# EAGLE board Arduino-Mega-2560-Adapter_2 (EAGLE 6.6.0)
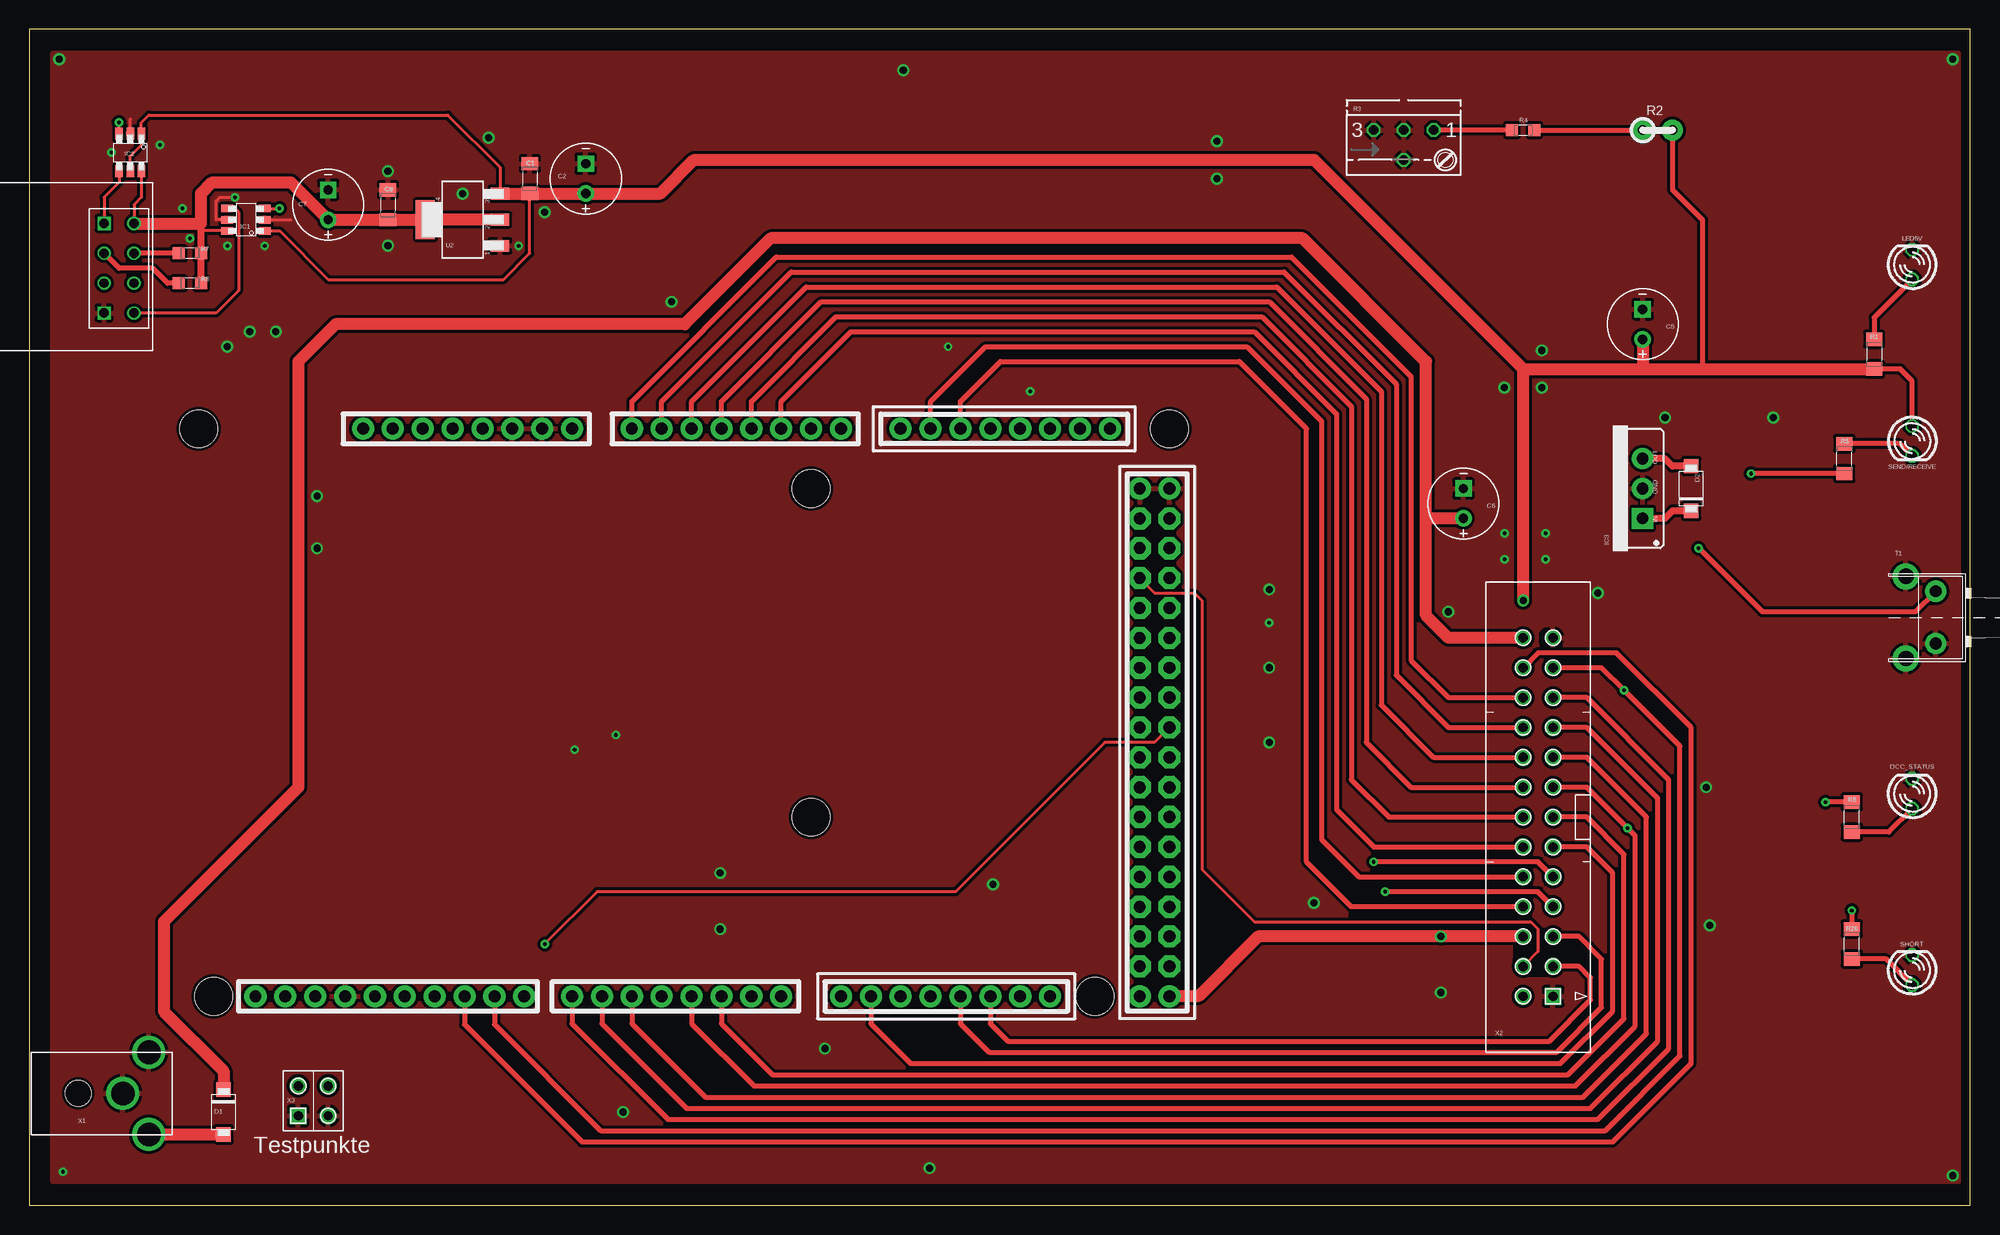
[diagram p0: board, top side]
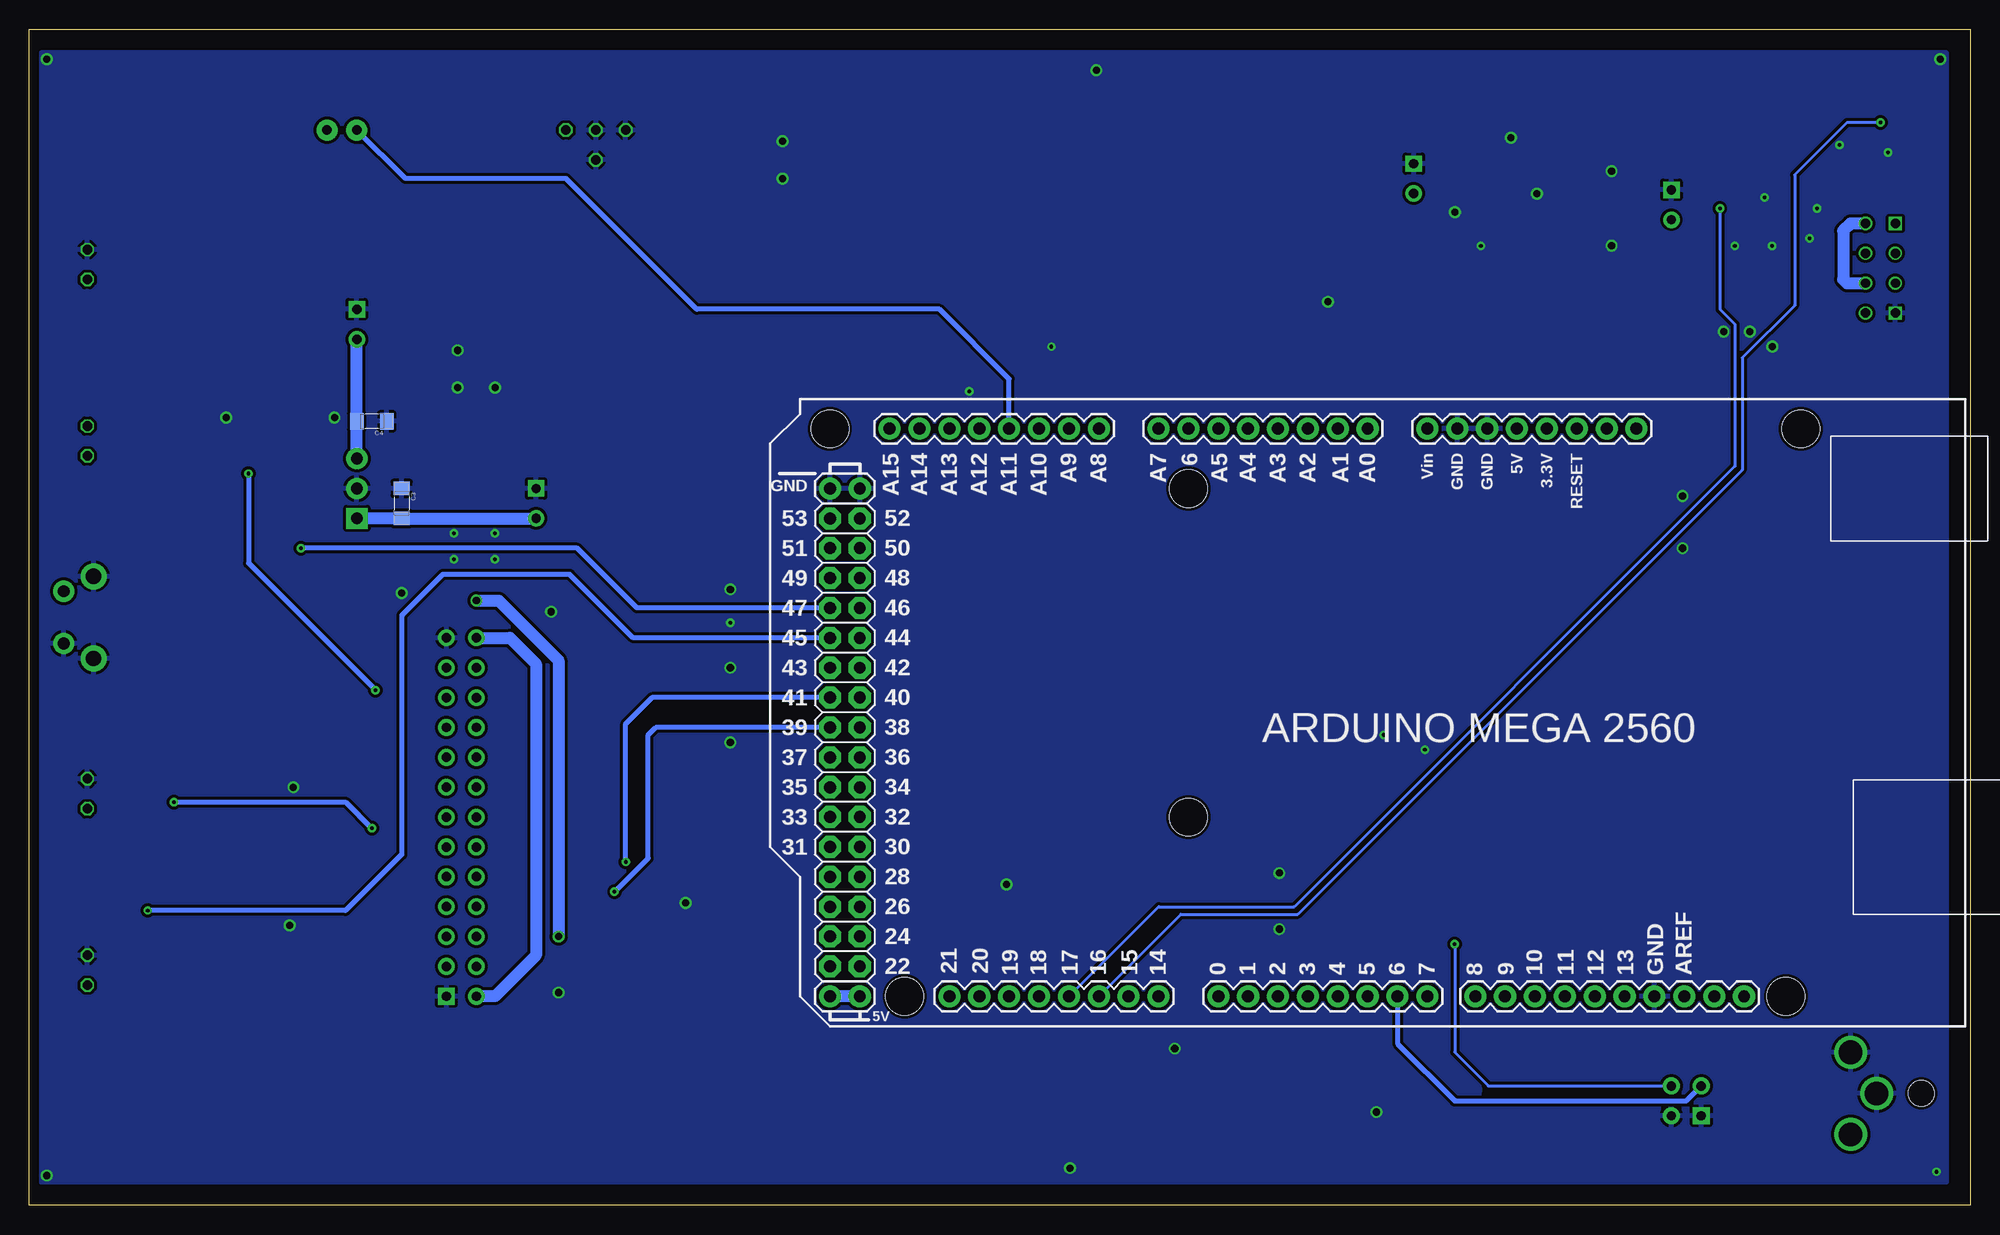
[diagram p1: board, bottom side, seen from below]

Size 165 x 100 mm. Coordinates in mm from the lower left corner, seen from the top.
Outline: 0,0 165,0 165,100 0,100 0,0
Copper layers (1*16): Top 0.035mm / dielectric 1.5mm / Bottom 0.035mm
Design rules "mme-pcb_Doppelseitig *": minimum track width 6mil, minimum drill 0.3mm, track to track 6mil, track to pad 6mil, pad to pad 6mil, via to via 6mil, smd to smd 0mil, copper to edge 8mil, drill to drill 8mil, minimum pad ring 6mil, minimum via ring 8mil, stop-mask expansion 4mil, vias tented up to drill 30mil, thermal gap 10mil
tRestrict: 6 lines
bRestrict: 1 lines

## Footprints (pad centres in the part's own frame; a part is rotated, then mirrored left to right if it is on the bottom)
C0805 = smd 1.143 x 1.372: 1 -1.27,0; 2 1.27,0
RM2.5_DIA6 = drill 0.8 pad 1.4 square: MINUS 0,0 | drill 0.8 pad 1.4: PLUS 0,2.54
SUB-SMA_ = smd 1.219 x 1.219: A -1.905,0; K 1.905,0
LED3MM_ = drill 0.813 octagon: A -1.27,0; K 1.27,0
SOT23-6_ = smd 0.635 x 1.016: 1 -0.953,-1.587; 2 0,-1.587; 3 0.953,-1.587; 4 0.953,1.587; 5 0,1.587; 6 -0.953,1.587
78XXS = drill 1 pad 1.8: GND 0,0; OUT 2.54,0 | drill 1 pad 1.8 square: IN -2.54,0
ARDUINO_MEGA2560 = drill 1.016 pad 1.88: 0 63.5,50.8; 1 60.96,50.8; 2 58.42,50.8; 3 55.88,50.8; 3.3V 35.56,2.54; 4 53.34,50.8; 5 50.8,50.8; 5V 38.1,2.54; 5V. 93.98,50.8; 5V.. 96.52,50.8; 6 48.26,50.8; 7 45.72,50.8; 8 41.656,50.8; 9 39.116,50.8; 10 36.576,50.8; 11 34.036,50.8; 12 31.496,50.8; 13 28.956,50.8; 14 68.58,50.8; 15 71.12,50.8; 16 73.66,50.8; 17 76.2,50.8; 18 78.74,50.8; 19 81.28,50.8; 20 83.82,50.8; 21 86.36,50.8; A0 50.8,2.54; A1 53.34,2.54; A2 55.88,2.54; A3 58.42,2.54; A4 60.96,2.54; A5 63.5,2.54; A6 66.04,2.54; A7 68.58,2.54; A8 73.66,2.54; A9 76.2,2.54; A10 78.74,2.54; A11 81.28,2.54; A12 83.82,2.54; A13 86.36,2.54; A14 88.9,2.54; A15 91.44,2.54; AREF 23.876,50.8; GND 26.416,50.8; GND. 43.18,2.54; GND.. 40.64,2.54; GND... 93.98,7.62; GND.... 96.52,7.62; I/OREF 30.48,2.54; N/C 27.94,2.54; RESET 33.02,2.54; SCL1 18.796,50.8; SDA1 21.336,50.8; VIN 45.72,2.54 | drill 1.016 pad 1.88 octagon: 22 93.98,48.26; 23 96.52,48.26; 24 93.98,45.72; 25 96.52,45.72; 26 93.98,43.18; 27 96.52,43.18; 28 93.98,40.64; 29 96.52,40.64; 30 93.98,38.1; 31 96.52,38.1; 32 93.98,35.56; 33 96.52,35.56; 34 93.98,33.02; 35 96.52,33.02; 36 93.98,30.48; 37 96.52,30.48; 38 93.98,27.94; 39 96.52,27.94; 40 93.98,25.4; 41 96.52,25.4; 42 93.98,22.86; 43 96.52,22.86; 44 93.98,20.32; 45 96.52,20.32; 46 93.98,17.78; 47 96.52,17.78; 48 93.98,15.24; 49 96.52,15.24; 50 93.98,12.7; 51 96.52,12.7; 52 93.98,10.16; 53 96.52,10.16 | hole 3.2: 15.24,50.8; 13.97,2.54; 66.04,35.56; 66.04,7.62; 90.17,50.8; 96.52,2.54
R0805 = smd 1.143 x 1.372: P$1 -1.27,0; P$2 1.27,0
RM02,5 = drill 0.8 pad 1.778: P$1 0,0; P$2 2.54,0
S64YW = drill 0.813 octagon: A 2.54,1.27; E -2.54,1.27; S 0,-1.27; S@1 0,1.27
R0603 = smd 1.016 x 1.016: P$1 -0.953,0; P$2 0.953,0
TACT6060-90°_ = drill 1 pad 1.8: 1 -2.223,0; 2 2.223,0 | drill 1.3 pad 2.2: 3 -3.493,2.54; 4 3.493,2.54
SOT223__ = smd 1 x 1.6: 1 -2.223,-3.175; 2 0,-3.175; 3 2.223,-3.175 | smd 3.3 x 1.6: 4 0,3.175
ESP01 = drill 0.8: CH_PD -1.27,0; GPIO0 1.27,2.54; GPIO2 -1.27,2.54; RST 1.27,0; TX -3.81,0; VCC 3.81,0 | drill 0.8 square: GND -3.81,2.54; RX 3.81,2.54
DCBU2,1-PRNB = drill 2 pad 2.8: AUßEN 0,2.223; INNEN -3.493,0; ÖFFNER 3.493,0 | hole 2.2: 0,6
2X13_WANNE_180° = drill 0.8 pad 1.422 square: P$1 0,0 | drill 0.8 pad 1.422: P$2 0,2.54; P$3 2.54,0; P$4 2.54,2.54; P$5 5.08,0; P$6 5.08,2.54; P$7 7.62,0; P$8 7.62,2.54; P$9 10.16,0; P$10 10.16,2.54; P$11 12.7,0; P$12 12.7,2.54; P$13 15.24,0; P$14 15.24,2.54; P$15 17.78,0; P$16 17.78,2.54; P$17 20.32,0; P$18 20.32,2.54; P$19 22.86,0; P$20 22.86,2.54; P$21 25.4,0; P$22 25.4,2.54; P$23 27.94,0; P$24 27.94,2.54; P$25 30.48,0; P$26 30.48,2.54
2X02_2.54MM = drill 0.8 pad 1.422 square: P$1 0,0 | drill 0.8 pad 1.422: P$2 0,2.54; P$3 2.54,0; P$4 2.54,2.54

## Placement (x,y rotation side)
C1  1µ  [C0805]  42.55,87.31 270 top
C2  100µ  [RM2.5_DIA6]  47.31,88.58 180 top
C3  1µ  [C0805]  133.35,59.69 270 bottom
C4  1µ  [C0805]  135.89,66.67 180 bottom
C5  100µ  [RM2.5_DIA6]  137.16,76.2 180 top
C6  100µ  [RM2.5_DIA6]  121.92,60.96 180 top
C7  100µ  [RM2.5_DIA6]  25.4,86.36 180 top
C8  1µ  [C0805]  30.48,85.09 270 top
D1  SS14L  [SUB-SMA_]  16.51,7.94 90 top
D2  SS14L  [SUB-SMA_]  141.29,60.96 270 top
DCC_STATUS  [LED3MM_]  160.08,35 90 top
IC1  74LVC1T45  [SOT23-6_]  18.41,83.82 90 top
IC2  74LVC1T45  [SOT23-6_]  8.57,89.53 180 top
IC3  DC/DC_5V  [78XXS]  137.16,60.96 90 top
LED5V  [LED3MM_]  160.08,80 90 top
PCB1  ARDUINO_MEGA2560  [ARDUINO_MEGA2560]  0.42,68.58 180 bottom
R1  470R  [R0805]  156.84,72.39 270 top
R2  TempSens.  [RM02,5]  137.16,91.44 0 top
R3  50k  [S64YW]  116.84,90.17 0 top
R4  10k  [R0603]  127,91.44 0 top
R5  470R  [R0805]  154.31,63.5 90 top
R6  470R  [R0805]  154.94,33.02 90 top
R7  10k  [R0603]  13.65,80.96 180 top
R8  10k  [R0603]  13.65,78.42 180 top
R20  470R  [R0805]  154.94,22.23 90 top
SEND/RECEIVE  [LED3MM_]  160.08,65 270 top
SHORT  [LED3MM_]  160.08,20 90 top
T1  TACT6060-90°  [TACT6060-90°_]  162.08,50 90 top
U2  1117-3,3  [SOT223__]  36.83,83.82 90 top
WIFI  ESP01  [ESP01]  8.89,79.69 90 top
X1  DCBU2,1-PRNB  [DCBU2,1-PRNB]  10.16,9.53 90 top
X2  2X13_WANNE_180°  [2X13_WANNE_180°]  129.54,17.78 90 top
X3  2X02_2.54MM  [2X02_2.54MM]  22.86,7.62 0 top

## Library data of the parts
C1 C3 C4 C8 = C
C2 C5-C7 = C-Elko
D1 D2 = Dioden
DCC_STATUS LED5V SEND/RECEIVE SHORT = LEDs
IC1 IC2 = SingleGateLogic
IC3 U2 = Spannungsregler
PCB1 = Arduino_Eagle_lib
R1 R4-R8 R20 = R
R2 = R_
R3 = Poti
T1 = Taster
WIFI = esp8266modules
X1 = DC-Buchsen
X2 = Z21-Connector
X3 = Stiftleisten

## Nets
+3V3: C7.PLUS C8.2 IC1.6 IC2.6 R7.P$1 R8.P$1 U2.2 U2.4 WIFI.CH_PD WIFI.VCC
+5V: C1.2 C2.PLUS C4.2 C5.PLUS D2.A IC1.1 IC2.1 IC2.5 IC3.OUT PCB1.5V. PCB1.5V.. R1.P$2 R2.P$2 SEND/RECEIVE.A U2.3 X2.P$6
CS: PCB1.10 X2.P$24
CURRENT_SENSE: PCB1.A9 X2.P$10
DCC: PCB1.6 X2.P$19 X3.P$2
DCC_IN: PCB1.2 X2.P$13
DCC_STATUS: PCB1.3 R6.P$2 X2.P$15
GND: C1.1 C2.MINUS C3.1 C4.1 C5.MINUS C6.MINUS C7.MINUS C8.1 DCC_STATUS.K IC1.2 IC1.5 IC2.2 IC3.GND LED5V.K PCB1.GND PCB1.GND. PCB1.GND.. PCB1.GND... PCB1.GND.... R3.E R3.S R3.S@1 SHORT.K T1.1 T1.3 T1.4 U2.1 WIFI.GND X1.AUßEN X1.ÖFFNER X2.P$1 X2.P$25 X3.P$1 X3.P$3
GO/STOP: PCB1.A4 X2.P$14
GO/STOP2: PCB1.39 X2.P$7 X3.P$4
LN_OUT: PCB1.7 X2.P$21
LN_RECEIVE: PCB1.48 X2.P$4
N$1: R7.P$2 WIFI.RST
N$2: R5.P$2 SEND/RECEIVE.K
N$3: DCC_STATUS.A R6.P$1
N$4: R20.P$1 SHORT.A
N$5: LED5V.A R1.P$1
N$6: R8.P$2 WIFI.GPIO0
N$7: C3.2 C6.PLUS D1.K D2.K IC3.IN X2.P$2 X2.P$26
N$8: D1.A X1.INNEN
N$9: R3.A R4.P$1
PROG: PCB1.A5 X2.P$12
RAILCOM: PCB1.15 X2.P$11
SCLOCK: PCB1.A1 X2.P$20
SDATA: PCB1.A0 X2.P$22
SHORT: PCB1.5 X2.P$17
SHORT2: PCB1.41 X2.P$9
SHORT_LED: PCB1.45 R20.P$2
SPS/LOAD: PCB1.A2 X2.P$18
SRESET: PCB1.A3 X2.P$16
TASTER: PCB1.47 T1.2
TEMP: PCB1.A11 R2.P$1 R4.P$2
V_RAIL: PCB1.A10 X2.P$8
WIFI_RX: IC2.3 PCB1.16
WIFI_RX3: IC2.4 WIFI.RX
WIFI_TX: IC1.3 PCB1.17
WIFI_TX3: IC1.4 WIFI.TX
XNET_RX: PCB1.19 X2.P$3
XNET_S/R: PCB1.9 R5.P$1 X2.P$23
XNET_TX: PCB1.18 X2.P$5

## Tracks (layer width: path | path; a pad name or v marks a point on that pad's centre or on a via)
+3V3
  Top 0.254: IC1.6 14.61,82.87 | WIFI.VCC 8.89,85.09 9.53,85.72 IC2.6
  Top 0.61: R8.P$1 R7.P$1 14.61,82.87 14.61,83.5
  Top 1.016: U2.2 U2.4 C8.2 C7.PLUS 22.23,87 15.56,87 14.61,86.04 14.61,83.5 WIFI.VCC
  Bottom 1.016: WIFI.VCC 10.16,83.5 10.79,82.87 10.79,78.74 10.48,78.42 WIFI.CH_PD
+5V  (via drill 0.6 pad 0.81)
  Top 0.254: IC1.1 21.27,82.87 25.4,78.74 40.32,78.74 42.55,80.96 C1.2 | U2.3 40.01,88.27 35.56,92.71 10.16,92.71 9.53,92.08 IC2.1 9.53,90.17 8.57,89.22 IC2.5
  Top 0.406: R2.P$2 139.7,86.36 142.24,83.82 142.24,71.12 | SEND/RECEIVE.A 160.08,70.11 159.07,71.12 R1.P$2
  Top 0.61: D2.A 139.7,62.87 139.06,63.5 IC3.OUT
  Top 1.016: 127,71.12 109.22,88.9 56.52,88.9 53.66,86.04 C2.PLUS C1.2 U2.3 | 127,71.12 137.16,71.12 | 137.16,71.12 142.24,71.12 R1.P$2 | v127,51.44 127,71.12 | X2.P$6 v120.02,22.86 104.46,22.86 99.38,17.78 PCB1.5V.. | C5.PLUS 137.16,71.12
  Bottom 1.016: PCB1.5V. PCB1.5V.. | v127,51.44 125.09,51.44 120.02,46.35 v120.02,22.86 | IC3.OUT C4.2 C5.PLUS
CS
  Top 0.406: PCB1.10 37,15.39 46.99,5.4 134.62,5.4 141.29,12.06 141.29,40.64 134.94,46.99 128.27,46.99 X2.P$24
CURRENT_SENSE
  Top 0.406: PCB1.A9 76.62,68.36 81.28,73.03 103.5,73.03 109.86,66.67 109.86,31.11 113.03,27.94 X2.P$10
DCC
  Top 0.406: PCB1.6 48.68,15.46 55.88,8.26 132.72,8.26 138.43,13.97 138.43,34.61 132.4,40.64 X2.P$19
  Bottom 0.406: X3.P$2 24.13,8.89 43.81,8.89 48.68,13.76 PCB1.6
DCC_IN
  Top 0.406: PCB1.2 58.84,15.46 63.18,11.11 130.81,11.11 135.57,15.88 135.57,29.84 132.4,33.02 X2.P$13
DCC_STATUS  (via drill 0.3 pad 0.61)
  Top 0.406: PCB1.3 56.3,15.46 61.59,10.16 131.44,10.16 136.53,15.24 136.53,31.43 v135.89,32.07 132.4,35.56 X2.P$15 | R6.P$2 v152.72,34.29
  Bottom 0.406: v152.72,34.29 138.11,34.29 v135.89,32.07
GND  (via drill 0.3 pad 0.61, 0.6)
  Top 0.254: IC1.2 22.23,83.82 | IC2.2 8.57,92.39 | IC1.5 15.88,83.82 15.88,85.41 16.19,85.72 v17.46,85.72
  other vias: 2.86,2.86 41.59,81.6 13.02,84.77 11.11,90.17 20,81.6 16.83,81.6 13.65,82.23 46.35,38.73 49.85,40.01 78.11,73.03 85.09,69.22 128.91,57.15 125.41,57.15 128.91,54.93 125.41,54.93 105.41,45.72 105.41,39.37 105.41,52.39 105.41,49.53 76.52,3.17 74.3,96.52 67.63,13.34 58.74,28.26 58.74,23.5 81.92,27.3 109.22,25.72 50.48,7.94 24.45,60.33 24.45,55.88 16.83,73.03 18.73,74.3 20.95,74.3 54.61,76.83 2.54,97.47 163.51,97.47 163.51,2.54 120.02,18.1 142.88,23.81 142.56,35.56 120.65,50.48 133.35,52.07 36.83,86.04 30.48,81.6 30.48,87.95 43.81,84.45 39.05,90.81 148.27,66.99 139.06,66.99 128.59,69.53 128.59,72.71 125.41,69.53 100.97,87.31 100.97,90.49 6.99,89.53
  pour Bottom (isolate 0.254): 2,2 2,98 164,98 164,2
  pour Top (isolate 0.254): 2,2 2,98 164,98 164,2
GO/STOP
  Top 0.406: PCB1.A4 61.38,68.36 68.58,75.56 104.78,75.56 112.39,67.94 112.39,36.2 115.57,33.02 X2.P$14
GO/STOP2  (via drill 0.3 pad 0.61)
  Top 0.254: PCB1.39 95.67,39.37 91.44,39.37 78.74,26.67 48.26,26.67 v43.81,22.23
  Top 0.406: X2.P$7 128.27,26.67 v115.25,26.67
  Bottom 0.254: v43.81,22.23 43.81,13.02 40.96,10.16 X3.P$4
  Bottom 0.406: PCB1.39 111.76,40.64 112.39,40.01 112.39,29.53 v115.25,26.67
LN_OUT
  Top 0.406: PCB1.7 46.14,15.46 54.29,7.3 133.35,7.3 139.38,13.34 139.38,36.2 132.4,43.18 X2.P$21
LN_RECEIVE
  Top 0.254: PCB1.48 95.67,52.07 99.06,52.07 99.69,51.44 99.69,28.57 104.14,24.13 127.64,24.13 128.27,23.5 128.27,21.59 X2.P$4
N$1
  Top 0.406: R7.P$2 WIFI.RST
N$2
  Top 0.406: SEND/RECEIVE.K 159.04,64.77 R5.P$2
N$3
  Top 0.406: DCC_STATUS.A 158.1,31.75 R6.P$1
N$4
  Top 0.406: SHORT.A 157.85,20.95 R20.P$1
N$5
  Top 0.406: LED5V.A 156.84,75.5 R1.P$1
N$6
  Top 0.406: R8.P$2 11.75,78.42 10.48,79.69 7.62,79.69 WIFI.GPIO0
N$7
  Top 0.61: D2.K 139.7,59.05 139.06,58.42 IC3.IN
  Top 1.016: X2.P$26 120.65,48.26 118.75,50.16 118.75,58.42 | 118.75,58.42 118.75,71.75 108.27,82.23 63.02,82.23 55.72,74.93 26.04,74.93 22.86,71.75 22.86,35.56 11.43,24.13 11.43,16.51 16.51,11.43 D1.K | C6.PLUS 118.75,58.42
  Bottom 1.016: X2.P$26 124.14,48.26 121.92,46.04 121.92,21.27 125.41,17.78 X2.P$2 | C6.PLUS C3.2 IC3.IN
N$8
  Top 1.016: X1.INNEN D1.A
N$9
  Top 0.406: R4.P$1 R3.A
PROG
  Top 0.406: PCB1.A5 63.92,68.36 69.85,74.3 104.14,74.3 111.12,67.31 111.12,33.66 114.3,30.48 X2.P$12
RAILCOM
  Top 0.406: PCB1.15 71.54,15.46 74.93,12.06 130.18,12.06 134.62,16.51 134.62,28.26 132.4,30.48 X2.P$11
SCLOCK
  Top 0.406: PCB1.A1 53.76,68.36 64.77,79.38 106.68,79.38 116.2,69.85 116.2,45.09 120.65,40.64 X2.P$20
SDATA
  Top 0.406: PCB1.A0 51.22,68.36 63.5,80.64 107.31,80.64 117.47,70.48 117.47,46.35 120.65,43.18 X2.P$22
SHORT
  Top 0.406: PCB1.5 51.22,15.46 57.47,9.21 132.08,9.21 137.48,14.61 137.48,33.02 132.4,38.1 X2.P$17
SHORT2  (via drill 0.3 pad 0.61)
  Top 0.406: X2.P$9 128.27,29.21 v114.3,29.21
  Bottom 0.406: PCB1.41 112.08,43.18 114.3,40.96 v114.3,29.21
SHORT_LED  (via drill 0.3 pad 0.61)
  Top 0.406: v154.94,25.08 R20.P$2
  Bottom 0.406: PCB1.45 113.67,48.26 119.06,53.66 129.86,53.66 133.35,50.16 133.35,29.84 138.11,25.08 v154.94,25.08
SPS/LOAD
  Top 0.406: PCB1.A2 56.3,68.36 66.04,78.11 106.05,78.11 114.94,69.22 114.94,42.55 119.38,38.1 X2.P$18
SRESET
  Top 0.406: PCB1.A3 58.84,68.36 67.31,76.83 105.41,76.83 113.67,68.58 113.67,39.37 117.47,35.56 X2.P$16
TASTER  (via drill 0.3 pad 0.61)
  Top 0.406: v141.92,55.88 147.32,50.48 160.34,50.48 T1.2
  Bottom 0.406: PCB1.47 113.35,50.8 118.43,55.88 v141.92,55.88
TEMP
  Top 0.406: R4.P$2 R2.P$1
  Bottom 0.406: PCB1.A11 81.7,70.27 87.63,76.2 108.27,76.2 119.38,87.31 133.03,87.31 R2.P$1
V_RAIL
  Top 0.406: X2.P$8 112.39,25.4 108.58,29.21 108.58,66.04 102.87,71.75 82.55,71.75 79.16,68.36 PCB1.A10
WIFI_RX  (via drill 0.3 pad 0.61)
  Top 0.254: IC2.3 v7.62,92.08
  Bottom 0.254: v7.62,92.08 10.48,92.08 14.92,87.63 14.92,76.52 19.37,72.07 19.37,62.55 57.15,24.77 67.09,24.77 PCB1.16
WIFI_RX3
  Top 0.254: WIFI.RX 6.35,85.72 7.62,87 IC2.4
WIFI_TX  (via drill 0.3 pad 0.61)
  Top 0.254: IC1.3 v21.27,84.77
  Bottom 0.254: v21.27,84.77 21.27,76.2 20,74.93 20,62.87 57.47,25.4 69,25.4 PCB1.17
WIFI_TX3
  Top 0.254: IC1.4 17.46,84.77 17.78,84.45 17.78,77.79 15.88,75.88 WIFI.TX
XNET_RX
  Top 0.406: PCB1.19 81.7,15.46 83.19,13.97 129.22,13.97 132.72,17.46 132.72,19.37 131.76,20.32 X2.P$3
XNET_S/R  (via drill 0.3 pad 0.61)
  Top 0.406: PCB1.9 39.54,15.39 48.58,6.35 133.99,6.35 140.34,12.7 140.34,39.05 v135.57,43.81 133.67,45.72 X2.P$23 | R5.P$1 v146.37,62.23
  Bottom 0.406: v146.37,62.23 146.37,54.61 v135.57,43.81
XNET_TX
  Top 0.406: PCB1.18 79.16,15.46 81.6,13.02 129.86,13.02 133.67,16.83 133.67,20.95 131.76,22.86 X2.P$5

## Text on the board
tPlace: Testpunkte
tStop: DCC | GO/Stop | GND
tDocu: Stiftleisten auf dieser Seite! | Achtung: Ethernet-Shield zuerst! | Teilweise lange Stiftleisten! | Arduino auf dieser Seite! | 165x100mm
bDocu: Stiftleisten auf der anderen Seite! | Achtung: Ethernet-Shield zuerst! | Teilweise lange Stiftleisten! | Arduino auf der anderen Seite!